# EAGLE board FTDI_Breakoput_Board (EAGLE 6.2)
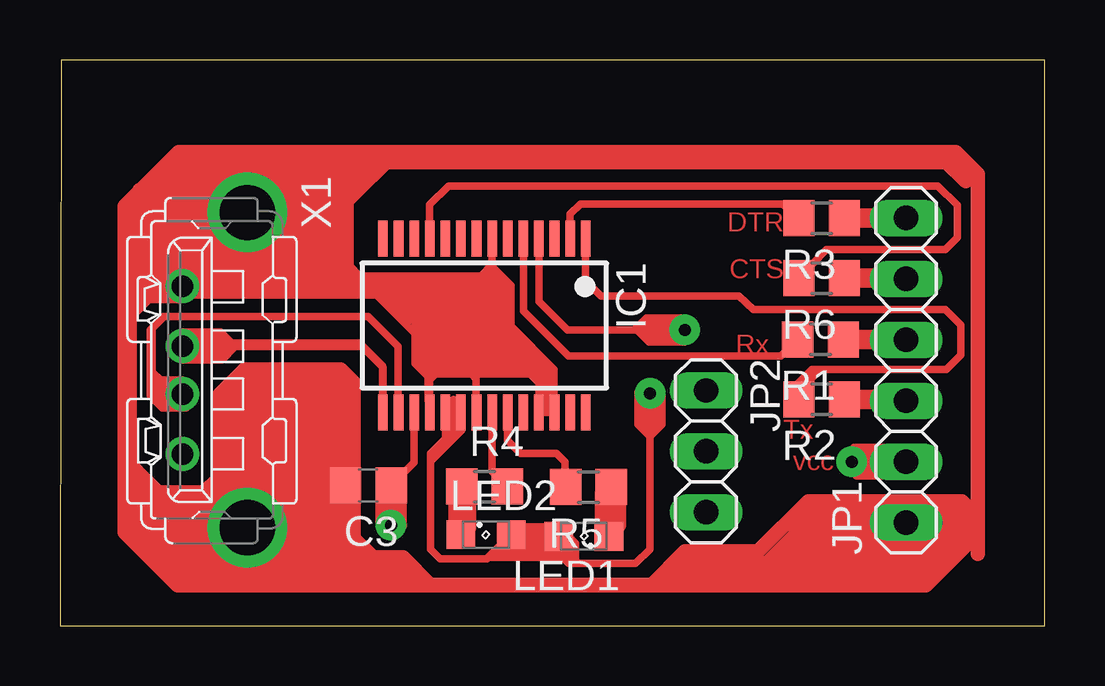
[diagram p0: board, top side]
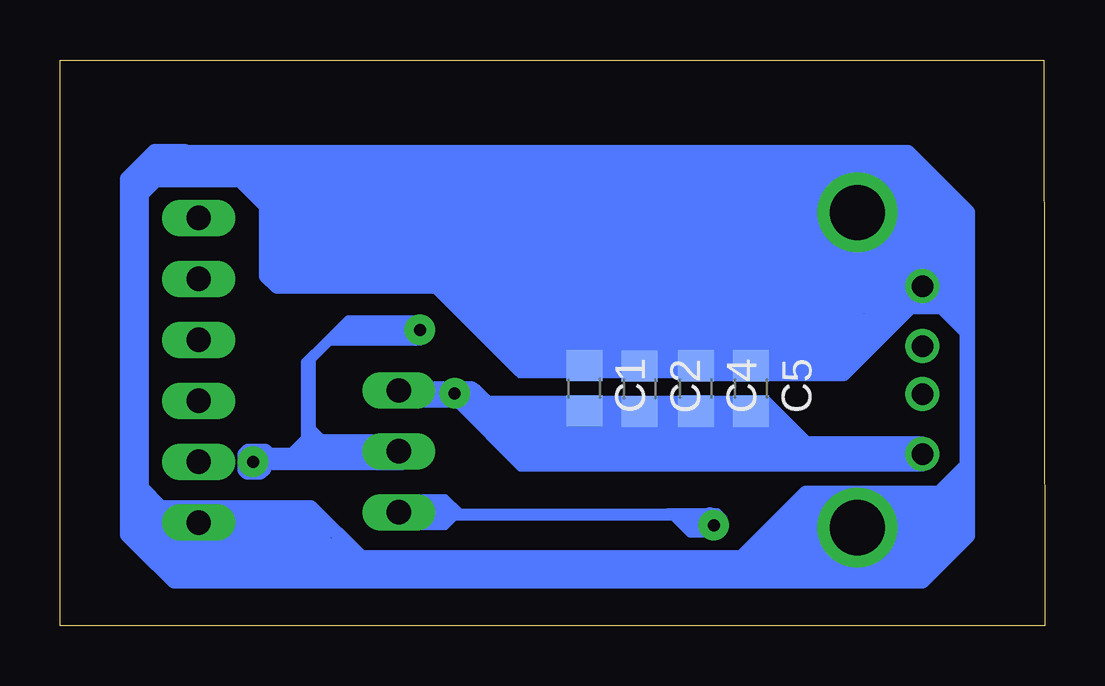
[diagram p1: board, bottom side, seen from below]

Size 41.05 x 23.6 mm. Coordinates in mm from the lower left corner, seen from the top.
Outline: 0,0 41.05,0 41.05,23.6 0.05,23.6 0,0
Copper layers (1*16): Top 0.035mm / dielectric 1.5mm / Bottom 0.035mm
Design rules: minimum track width 10mil, minimum drill 24mil, track to track 8mil, track to pad 8mil, pad to pad 8mil, via to via 8mil, smd to smd 8mil, copper to edge 40mil, drill to drill 8mil, minimum pad ring 10mil, minimum via ring 8mil, stop-mask expansion 4mil, vias tented up to drill 0mil, thermal gap 10mil

## Footprints (pad centres in the part's own frame; a part is rotated, then mirrored left to right if it is on the bottom)
C0805 = smd 1.3 x 1.5: 1 -0.95,0; 2 0.95,0
SSOP28 = smd 0.4 x 1.5: 1 -4.225,-3.625; 2 -3.575,-3.625; 3 -2.925,-3.625; 4 -2.275,-3.625; 5 -1.625,-3.625; 6 -0.975,-3.625; 7 -0.325,-3.625; 8 0.325,-3.625; 9 0.975,-3.625; 10 1.625,-3.625; 11 2.275,-3.625; 12 2.925,-3.625; 13 3.575,-3.625; 14 4.225,-3.625; 15 4.225,3.625; 16 3.575,3.625; 17 2.925,3.625; 18 2.275,3.625; 19 1.625,3.625; 20 0.975,3.625; 21 0.325,3.625; 22 -0.325,3.625; 23 -0.975,3.625; 24 -1.625,3.625; 25 -2.275,3.625; 26 -2.925,3.625; 27 -3.575,3.625; 28 -4.225,3.625
1X06 = drill 1.016 long: 1 -6.35,0; 2 -3.81,0; 3 -1.27,0; 4 1.27,0; 5 3.81,0; 6 6.35,0
1X03 = drill 1.016 long: 1 -2.54,0; 2 0,0; 3 2.54,0
SML0805 = smd 1.2 x 1.2: A 1.05,0; C -1.05,0
R0805 = smd 1.3 x 1.5: 1 -0.95,0; 2 0.95,0
KUSBVX = drill 0.9 pad 1.3: 1 3.5,0; 2 1,0; 3 -1,0; 4 -3.5,0 | drill 2.3 pad 2.8: M1 -6.57,2.71; M2 6.57,2.71

## Placement (x,y rotation side)
C1  [C0805]  19.19,9.91 270 bottom
C2  [C0805]  16.89,9.89 270 bottom
C3  [C0805]  12.86,5.86 180 top
C4  [C0805]  14.55,9.9 270 bottom
C5  [C0805]  12.25,9.9 270 bottom
IC1  FT232RL  [SSOP28]  17.69,12.53 180 top
JP1  [1X06]  35.27,10.66 90 top
JP2  [1X03]  26.93,7.28 270 top
LED1  [SML0805]  21.84,3.74 180 top
LED2  [SML0805]  17.76,3.81 0 top
R1  [R0805]  31.7,11.95 180 top
R2  [R0805]  31.75,9.45 180 top
R3  [R0805]  31.75,17 180 top
R4  [R0805]  17.7,5.81 0 top
R5  [R0805]  22.03,5.79 180 top
R6  [R0805]  31.75,14.5 180 top
X1  KUSBVX  [KUSBVX]  5.1,10.67 270 top

## Library data of the parts
C1-C5 R1-R6 = rcl
IC1 = ftdichip; MPN: FT232RL; OC_FARNELL: 1146032; OC_NEWARK: 91K9918
JP1 JP2 = pinhead
LED1 LED2 = led
X1 = con-kycon

## Nets
3V3: C3.1 IC1.17 JP2.3
CTS: IC1.11 R6.2
D+: IC1.15 X1.3
D-: IC1.16 X1.2
DTR: IC1.2 R3.2
GND: C1.1 C2.1 C3.2 C4.1 C5.1 IC1.7 IC1.18 IC1.21 IC1.25 IC1.26 JP1.1 X1.4 X1.M1 X1.M2
N$1: JP1.3 R2.1
N$2: JP1.4 R1.1
N$3: JP1.5 R6.1
N$4: IC1.23 R5.2
N$5: IC1.22 R4.2
N$6: JP1.6 R3.1
N$7: LED1.C R5.1
N$8: LED2.C R4.1
POWER: IC1.4 JP1.2 JP2.2
RX: IC1.5 R1.2
TX: IC1.1 R2.2
VCC: C1.2 C2.2 C4.2 C5.2 IC1.19 IC1.20 JP2.1 LED1.A LED2.A X1.1

## Tracks (layer width: path | path; a pad name or v marks a point on that pad's centre or on a via)
3V3  (via drill 0.5 pad 1.27)
  Top 0.305: IC1.17 14.76,6.82 C3.1 v13.8,4.2
  Bottom 0.305: JP2.3 14.34,4.74 v13.8,4.2 14.15,3.85 14.8,3.85 15.7,4.75 13.65,4.75 13.4,4.5 13.4,4.35 13.7,4.05 14.6,4.05 15.15,4.6 14.35,4.6 14.05,4.3 14.7,4.3 14.85,4.45 15.15,4.45 15.25,4.55
CTS
  Top 0.305: IC1.11 15.42,17.57 16.2,18.35 36.6,18.35 37.4,17.55 37.4,16.2 36.9,15.7 31.95,15.7 R6.2
D+
  Top 0.305: IC1.15 13.46,10.79 12.6,11.65 7.3,11.65 | 7.3,11.65 5.12,11.65 X1.3 | 5.05,11.65 5.1,11.7 | 5.1,11.7 5.1,12.25 | 5.1,11.7 5.1,11.1 6.75,11.1 7.3,11.65 | 7.3,11.65 6.7,12.25 5.1,12.25 | 5.1,12.25 5.35,12 5.35,11.35 5.4,11.4 6.85,11.4 6.8,11.45 6.8,11.95 5.55,11.95 5.5,12
D-
  Top 0.305: X1.2 4.23,9.67 3.75,10.15 | 3.75,10.15 3.75,12.35 4.3,12.9 4.35,12.9 | 4.35,12.9 12.85,12.9 14.1,11.65 14.1,8.92 IC1.16 | 5.15,9.75 5.15,10.2 5.1,10.25 4.2,10.25 3.85,10.6 3.85,12.4 4.35,12.9 | 3.75,10.15 3.75,9.6 4.25,9.1 5.25,9.1 5.3,9.15 5.3,10.2 3.95,10.2 4.2,9.95 4.9,9.95 5.1,9.75 5.1,9.3 4.75,9.65 3.95,9.65 4.3,9.3 4.85,9.3 4.7,9.45 4.25,9.45
DTR
  Top 0.305: IC1.2 21.26,17.17 21.7,17.6 30.1,17.6 R3.2
GND
  Top 0.305: IC1.26 IC1.25 19.96,10.14 19.6,10.5 17.45,10.5 | 17.15,10.5 15.65,10.5 15.42,10.27 IC1.18 15.42,12.64 13.88,14.17 X1.4 4.27,14.17 3.05,12.95 | 17.15,10.5 17.35,10.3 17.35,8.92 IC1.21 | 17.45,10.5 17.15,10.5 | JP1.1 32.81,1.85 10.06,1.85 X1.M2 | IC1.7 18.01,11.07 17.7,10.75 17.45,10.5 | 3.05,12.95 3.05,5.4 4.4,4.05 7.76,4.05 X1.M2 | C3.2 9.57,5.86 X1.M2 | X1.M1 3.99,17.24 3.05,16.3 3.05,12.95
  Top 0.406: 17.75,14.45 17.7,14.4 17.7,10.75
  Bottom 0.305: C1.1 17.11,10.86 C2.1
  Bottom 0.61: C5.1 C4.1 C2.1 | 17.11,10.86 13.8,14.17 X1.4
N$1
  Top 0.813: R2.1 35.21,9.45 JP1.3
N$2
  Top 0.813: R1.1 35.25,11.95 JP1.4
N$3
  Top 0.813: R6.1 35.24,14.5 JP1.5
N$4
  Top 0.305: IC1.23 18.67,7.74 19.2,7.2 20.7,7.2 21.05,6.85 21.05,5.82 R5.2
N$5
  Top 0.305: IC1.22 18.01,6.45 R4.2
N$6
  Top 0.813: R3.1 JP1.6
N$7
  Top 0.61: LED1.C 22.89,5.7 R5.1
N$8
  Top 0.61: LED2.C 16.71,5.77 R4.1
N$9
  Top 0.813: 35.3,4.2 37.35,4.2 37.4,4.15
N$11
  Top 0.305: 5.1,13.8 14.05,13.8 14.8,13.05 14.8,10.95 15.35,10.4 15.35,9.4
  Top 0.61: 7.95,17.25 5.1,14.4 5.1,13.8
N$12
  Top 0.305: 18,15.2 18,15.05 17.55,14.6 12.5,14.6 12.1,15 12.1,17.65 14.05,19.6 16.75,19.6
N$13
  Top 0.406: 5.4,14.05 5.45,14 13.85,14
N$14
  Top 0.406: 14.15,14.4 14.1,14.45 10.9,14.45
N$15
  Top 0.305: 20.6,8.95 20.6,10.7 18.8,12.5 18.8,14.2 18,15 18,14.6 17.85,14.45 17.85,14.6 17.9,14.65
N$16
  Top 0.305: 15.1,14.5 15.1,10.9 15.25,10.75
N$17
  Top 0.305: 14.25,14.4 17.35,14.4 17.45,14.3
N$18
  Top 0.305: 15.6,10.65 15.5,10.65 15.45,10.6 15.45,12.85 14.05,14.25 14.75,14.25 14.95,14.05 14.95,13.65 14.9,13.6 14.9,13.75 14.55,14.1
N$19
  Top 0.305: 14.95,12.05 13.15,13.85 12.35,13.85
N$20
  Top 0.305: 13.6,13.7 14.55,12.75 14.7,12.75 13.9,13.55 13.9,13.7
N$21
  Top 0.305: 18.25,14.55 17.95,14.25 17.95,10.8
N$22
  Top 0.305: 18.1,14.1 18.15,14.05 18.65,14.05 18.35,14.35 18.25,14.35
N$23
  Top 0.305: 20.3,9.2 20.3,10.65 18.65,12.3 18.65,13.8 18.6,13.85 18.3,13.85 18.25,13.8 18.25,11 18,10.75 19.6,10.75 20.1,10.25 20.1,9.25 20.2,9.15 20.2,10.45 18.5,12.15 | 18.5,12.15 18.5,13.65 | 18.5,12.15 18.5,11 19.4,11 | 19.4,11 19.45,10.95 | 19.4,11 18.7,11.7 18.7,11.1 18.8,11.1 18.9,11.2
N$24
  Top 0.406: 5.2,13.75 5.1,13.75 5,13.65 3.7,13.65 2.95,12.9
N$25
  Top 0.406: 13.3,19.3 13.3,19.15 12.25,18.1 12.25,18.15 13.6,19.5 12.45,19.5 12.25,19.3 12.25,18.5 12.35,18.4 12.35,18.75 12.85,19.25 | 12.85,19.25 12.9,19.25 | 12.85,19.25 12.45,19.25
N$26
  Top 0.406: 3.25,18.25 3.25,17.55 3.15,17.45 4.9,17.45 4.95,17.4 4.95,19.1 4.8,19.25 4.8,19.05 3.45,17.7 4.7,17.7 4.8,17.8 4.8,18.45 4.65,18.6 4.65,18.4 4.15,17.9 4.45,17.9 4.5,17.85
N$27
  Top 0.406: 3,13.95 4.75,13.95 4.85,13.85
N$28
  Top 0.406: 3.25,13.6 3.3,13.6 3.45,13.75
N$29
  Top 0.406: 7.5,9.95 11.8,9.95 11.85,9.9 11.85,10.05 11.6,10.3 7.85,10.3 7.3,9.75
N$30
  Top 0.406: 3,5.5 6.5,5.5 6.65,5.65 3.55,5.65 3.3,5.9
N$31
  Top 0.406: 3.4,5.1 6.7,5.1
N$32
  Top 0.406: 3.15,5.2 3.15,4 4.9,2.25 4.9,2.8 3.4,4.3 3.4,4.7 3.45,4.75 3.45,4.65 4.8,3.3 4.8,4.55 4.5,4.85 4,4.85 3.95,4.9 3.95,4.85 4.65,4.15 4.65,3.75 4.6,3.7
N$33
  Top 0.406: 6.65,5.3 3.4,5.3 3.35,5.25
N$34
  Top 0.406: 2.9,7.05 2.9,6.9 3.7,6.1
N$35
  Bottom 0.61: 30.75,4.55 30.75,4.65 30.7,4.7
N$36
  Bottom 0.61: 14.15,10.7 14.2,10.7 14.4,10.5 8.4,10.5
N$37
  Top 0.305: 7.4,11.8 12.5,11.8 13.45,10.85 13.45,9.3
N$38
  Top 0.305: 8.3,11.7 8.2,11.8 6.75,11.8
N$40
  Top 0.305: 24.8,9.6 24.85,9.55 24.85,8.35 24.4,8.35 24.35,8.4 24.35,9.55
N$41
  Top 0.305: 26.1,12.4 26.1,12.85 24.45,12.85 24,12.4 24.55,11.85 26,11.85 25.7,12.15 25.7,12.2 24.55,12.2 24.55,12.05 24.6,12 25.55,12 25.6,12.05 25.6,12.6 24.45,12.6
N$42
  Top 0.305: 33,6.95 33,7.35 33.1,7.45 35.7,7.45 35.9,7.25 35.9,6.25 33.2,6.25 33,6.45 33,6.95 | 33,6.95 33.45,6.5 33.75,6.5 33.8,6.45 33.95,6.45 33.75,6.65 33.75,6.7 33.5,6.45 33.2,6.45 33.15,6.5 33.15,7.15 35,7.15
N$43
  Top 0.305: 35,6.55 33.95,6.55
N$44
  Top 0.305: 13.85,4.15 14.3,4.15 14.3,5.55
N$45
  Top 0.305: 13.5,5.3 13.3,5.3 13.3,4.35 13.5,4.15 13.6,4.15 13.65,4.2 13.65,5 13.55,5.1 13.55,4.45 13.45,4.35 13.9,4.35 14,4.25 14,5.2
N$46
  Top 0.305: 16.4,9.45 16.4,8.25 16.75,8.25 16.75,8.15 15.5,6.9
N$47
  Top 0.305: 16.25,7.8 16.25,8.15 16.3,8.2 16.45,8.05
N$48
  Bottom 0.61: 8.25,11.55 8.25,13.65 8.15,13.75 4.05,13.75 3.45,13.15 3.45,16.9 5.5,18.95 5.5,14.8 4.85,14.15 3.95,14.15 3.95,16.85 5.1,18 5.1,15.05 4.7,14.65 4.5,14.65 4.5,16.7 4.85,17.05
N$49
  Bottom 0.61: 5.7,13.6 5.95,13.6 8.45,11.1 8.45,11.7 6.8,13.35 7.75,13.35 7.85,13.25 7.85,12.9 7.8,12.85
N$50
  Bottom 0.61: 20,11.95 20,11.9 21.25,10.65 21.85,10.65 25.35,14.15 32,14.15 32.45,14.6 32.45,17.5 33.55,18.6
N$51
  Bottom 0.61: 33.3,18.55 33.35,18.6 37,18.6
N$52
  Bottom 0.61: 30.65,19.6 30.5,19.45 30.5,14.6 30.55,14.55 31.9,14.55 32.05,14.7 32.05,18.85 32.25,19.05 36.1,19.05 35.9,19.25 35.9,19.35 30.9,19.35 31.55,18.7 33.15,18.7 32.45,18 32.15,18 32.4,18.25 32.4,18.45 31.7,19.15 31.7,19.2 31.55,19.05 30.95,19.05 31.05,18.95 31.05,15.05 31.25,14.85 31.45,14.85 31.45,19
N$53
  Bottom 0.61: 21.65,14.1 22,13.75 22,11.45 24.65,14.1 24.65,14.15 24.45,13.95 22.35,13.95 22.4,13.9 22.4,12.45 23.45,13.5 23.45,13.7 23.55,13.6 23.65,13.6 23.45,13.4 22.75,13.4
N$54
  Bottom 0.61: 12.65,8.9 12.25,9.3 11.8,9.3
N$55
  Bottom 0.61: 5.1,7.25 9.6,7.25 11.65,9.3 23.3,9.3 23.9,9.9 26.95,9.9 27.1,9.75 26.75,9.4 23.9,9.4
N$56
  Bottom 0.61: 23.6,9.25 21.95,7.6 10.4,7.6 | 10.35,7.6 10.4,7.6 | 10.4,7.6 10.25,7.45 10.1,7.45 11.2,8.55 22.4,8.55 22,8.15 22,8.1 21.95,8.15 11.15,8.15
N$57
  Bottom 0.61: 34.45,19.5 35.55,19.5 35.85,19.8 37.1,19.8 38.25,18.65 38.25,3.8 37.65,3.2 | 8.35,10.55 5.6,13.3 4.3,13.3 3.25,12.25 3.25,8.25 | 3.25,8.25 3.25,6.7 4.35,5.6 | 3.2,7.15 3.2,17.25 5.7,19.75 35.9,19.75 37.65,18 37.65,5.75 | 3.2,7.15 3.2,6.4 | 3.2,6.4 4.05,5.55 9.95,5.55 12.65,2.85 28.5,2.85 30.6,4.95 36.85,4.95 37.65,5.75 | 3.25,8.25 3.2,7.15 | 3.2,6.4 3.2,3.75 5.1,1.85 36.3,1.85 37.65,3.2 | 37.65,3.2 37.65,3.95 | 37.65,5.75 37.65,3.95 | 37.65,3.95 36.1,2.4 29.05,2.4 28.9,2.55 29.05,2.55 30.85,4.35 36.75,4.35 37.25,4.85 37.25,4.35 35.85,2.95 29.85,2.95 29.8,2.9 30.1,2.9 31.15,3.95 36.1,3.95 36.2,3.85 36.4,3.85 | 36.4,3.85 36.45,3.9 | 36.4,3.85 36,3.45 30.85,3.45 29.75,2.35 12.35,2.35 9.35,5.35 3.45,5.35 3.45,4.2 5.3,2.35 11.8,2.35 11.9,2.25 11.75,2.25 9.3,4.7 4.25,4.7 4.15,4.8 3.95,4.8 3.75,5 8.9,5 11,2.9 5.55,2.9 3.9,4.55 8.75,4.55 10.1,3.2 5.85,3.2 4.9,4.15 8.7,4.15 9.2,3.65 5.9,3.65 5.5,4.05
N$58
  Bottom 0.61: 36.5,19.65 36.5,19.6 37.9,18.2
N$59
  Bottom 0.61: 33,6.8 33,6.45 32.9,6.45 32.5,6.85 32.5,7.2 32.45,7.25 32.5,7.3 33.2,7.3 33.35,7.15 33.35,6.5 33.25,6.4 32.7,6.4 32.55,6.55 32.55,7.1
N$60
  Bottom 0.305: 27.1,4.75 27.1,5.25 27,5.35 25,5.35 24.4,4.75 25,4.15 26.9,4.15 27,4.25 27,4.5 26.95,4.55 24.9,4.55 25.05,4.4 26.75,4.4 26.8,4.45 26.8,5.05 26.75,5 24.8,5 24.95,5.15 27.05,5.15
N$63
  Bottom 0.305: 29.55,11.95 29.4,12.1 26.2,12.1
N$64
  Bottom 0.305: 5.1,7.1 5.1,7.75 10.6,7.75 10.8,7.55 5.3,7.55 5.25,7.6 5.25,6.75 5.1,6.6 21.85,6.6 24.55,9.3
N$65
  Bottom 0.305: 21.9,6.85 21.9,6.95 5.55,6.95 5.45,6.85 21.9,6.85 | 21.9,6.85 22.5,7.45
N$66
  Bottom 0.305: 15.4,4.55 25.2,4.55 25.35,4.7
N$67
  Bottom 0.305: 30.55,7.25 30.55,10.75 30.55,11.15 30.55,11.25
N$68
  Bottom 0.305: 30.6,11.05 29.65,12
N$69
  Top 0.305: 12.15,2.7 14,2.7 14.65,2.05 13.25,2.05 12.4,2.9 12.4,2.2 12.5,2.1 14.1,2.1 14.2,2.2 12.8,2.2 12.6,2.4 14.15,2.4 14.2,2.35
N$70
  Top 0.305: 25.6,2.35 36.4,2.35 37.7,3.65 37.7,4.65 37.65,4.7
  Top 0.406: 37.65,4.7 31.4,4.7 29.4,2.7 26.15,2.7 25.5,2.05 36.05,2.05 36.1,2.1 36.1,2.4 37.4,3.7 36.7,4.4 31.55,4.4 31.15,4 | 30.25,3.1 29.7,2.55 29.6,2.55 30.7,3.65 36.95,3.65 36.6,4 31.15,4 | 31.15,4 30.25,3.1 | 30.25,3.1 30.25,2.65 30.15,2.55 30,2.55 30.85,3.4 36.85,3.4 36.1,2.65 30.5,2.65 30.9,3.05 36.45,3.05
N$71
  Top 0.406: 25.8,12.45 25.8,12.65 26.05,12.4 26.05,11.9
N$72
  Top 0.406: 18.6,3.45 18.7,3.35 20.75,3.35 20.5,3.6 19.15,3.6 19.2,3.65 19.2,4.15 19.25,4.1 21,4.1
N$74
  Top 0.305: 33.4,6.6 33.6,6.6 33.7,6.7
N$76
  Top 0.61: 16.5,5.25 16.5,4.15 16.45,4.1
N$77
  Top 0.61: 17.05,5.65 17.05,4.1 16.95,4
N$78
  Top 0.61: 23.3,5.4 23.3,4.2 23.2,4.1
N$79
  Top 0.61: 22.6,5.55 22.6,4.3 22.85,4.05
N$80
  Bottom 0.61: 13.95,4.65 13.7,4.4
N$81
  Top 0.61: 13.25,19.35 36.95,19.35 37.75,18.55 37.75,19.15 37.15,19.75 | 7.75,3.85 7.75,2.6 7.8,2.55 | 8.65,1.7 15.45,1.7 | 15.45,1.7 24.65,1.7 | 24.65,1.7 36.1,1.7 37.95,3.55 37.95,4.85 37.6,5.2 31.2,5.2 29.1,3.1 26.05,3.1 24.65,1.7 | 15.45,1.7 14.3,2.85 13.05,2.85 12.25,3.65 12.25,10.15 11.7,10.7 7.7,10.7 6.65,9.65 6.65,6.2 5.95,5.5 4.15,5.5 3.2,6.45 | 7.8,3.8 7.8,2.55 | 7.8,2.55 8.65,1.7 | 8.65,1.7 4.9,1.7 2.7,3.9 2.7,17.5 4.95,19.75 12.55,19.75 | 37.15,19.75 37.35,19.75 38.25,18.85 38.25,3 | 37.15,19.75 12.55,19.75 | 12.55,19.75 11.95,19.15
POWER  (via drill 0.5 pad 1.27)
  Top 0.305: IC1.4 19.96,13.54 21.15,12.35 v26.05,12.35 | JP1.2 v33,6.85
  Bottom 0.305: v26.05,12.35 29.5,12.35 | 26.46,7.25 JP2.2 | 27.9,7.3 27.15,7.3 26.7,7.3 26.41,7.3 JP2.2 | v33,6.85 32.57,7.28 30.25,7.28 | 30.25,7.28 JP2.2 | 29.5,12.35 30,11.85 | 30.85,7.88 30.85,11 30,11.85 | 30.85,7.88 30.25,7.28 | 30.85,7.88 30.85,7.85 31.65,7.05 31.35,7.05 30.8,7.6 30.8,7.45 30.65,7.3 | 26,12.3 26,12.8 29.05,12.8 29.5,12.35 | 29,12.5 29,12.6 28.95,12.65 26.3,12.65 26.15,12.5 26.15,11.95 26.05,11.85 30,11.85
  Bottom 0.61: 27.15,7.3 27.15,6.8 | 27.15,6.8 27.25,6.8 | 27.25,6.8 32.15,6.8 32.35,7 27.6,7 27.55,7.05 | 26.7,7.3 26.7,6.9 | 26.7,6.9 26.8,6.8 27.15,6.8 | 27.3,7 27.3,6.85 27.25,6.8 | 26.7,6.9 26.5,7.1 26.5,7.45 26.75,7.7 30.2,7.7 30.6,8.1
RX
  Top 0.305: IC1.5 19.32,13.14 21.2,11.25 30.05,11.25 R1.2
TX
  Top 0.305: IC1.1 21.92,14.39 22.55,13.75 28.3,13.75 28.9,13.2 36.9,13.2 37.55,12.55 37.55,11.3 36.95,10.7 31.7,10.7 | 31.7,10.7 31.35,10.7 30.95,10.3 | 30.95,10.3 30.7,10.05 30.7,9.55 R2.2 | 31.05,9.9 31.3,9.9 31.3,10.4 31.35,10.45 31.3,10.45 31.1,10.25 30.95,10.3 | 31.05,10.1 31.1,10.1 31.7,10.7
VCC  (via drill 0.5 pad 1.27)
  Top 0.305: 17.85,2.85 17.8,2.8 15.85,2.8 15.45,3.2 15.45,7.2 16.07,7.82 IC1.19 IC1.20 | 18.1,3.1 LED2.A 20.72,3.81 LED1.A 20.79,3.01 21.2,2.6 24,2.6 24.6,3.2 24.6,7.9 | 24.6,7.9 v24.6,9.7 | 24.55,9.7 24.5,9.75 24.1,9.75 24.1,8.4 24.6,7.9 | 24.6,7.9 25.1,8.4 25.1,9.75 | 21.5,2.7 21.5,3.45 21.1,3.85 21.1,3.05 21.35,2.8 21.35,3.05 21.3,3.1 18.1,3.1 | 18.1,3.1 17.85,2.85 | 17.85,2.85 21.15,2.85 21.35,2.65 | 25.05,9.4 25.05,9.7 25.1,9.75 | 25.1,9.75 24.35,9.75 24.2,9.6
  Bottom 0.305: JP2.1 26.81,9.7 v24.6,9.7 22.07,7.17 X1.1
  Bottom 0.61: C5.2 C4.2 C2.2 | C2.2 19.17,8.94 C1.2 | C2.2 22.9,8.95 23.77,9.82 JP2.1
(copper drawn outside any net)
  shapes: Bottom area x2, Top area x5

## Text on the board
Top: DTR | CTS | Rx | Tx | vcc